# Altium PCB AT89S52精简开发板.PCBDOC (part 2 of 2)
Units mm, origin at the board's own origin, x right, y up, seen from the top; angles counter-clockwise.
Board outline 152.4 x 101.6 mm, 2 copper layers (Top Layer, Bottom Layer); 41 components, 53 nets, 208 pads, 4 vias.
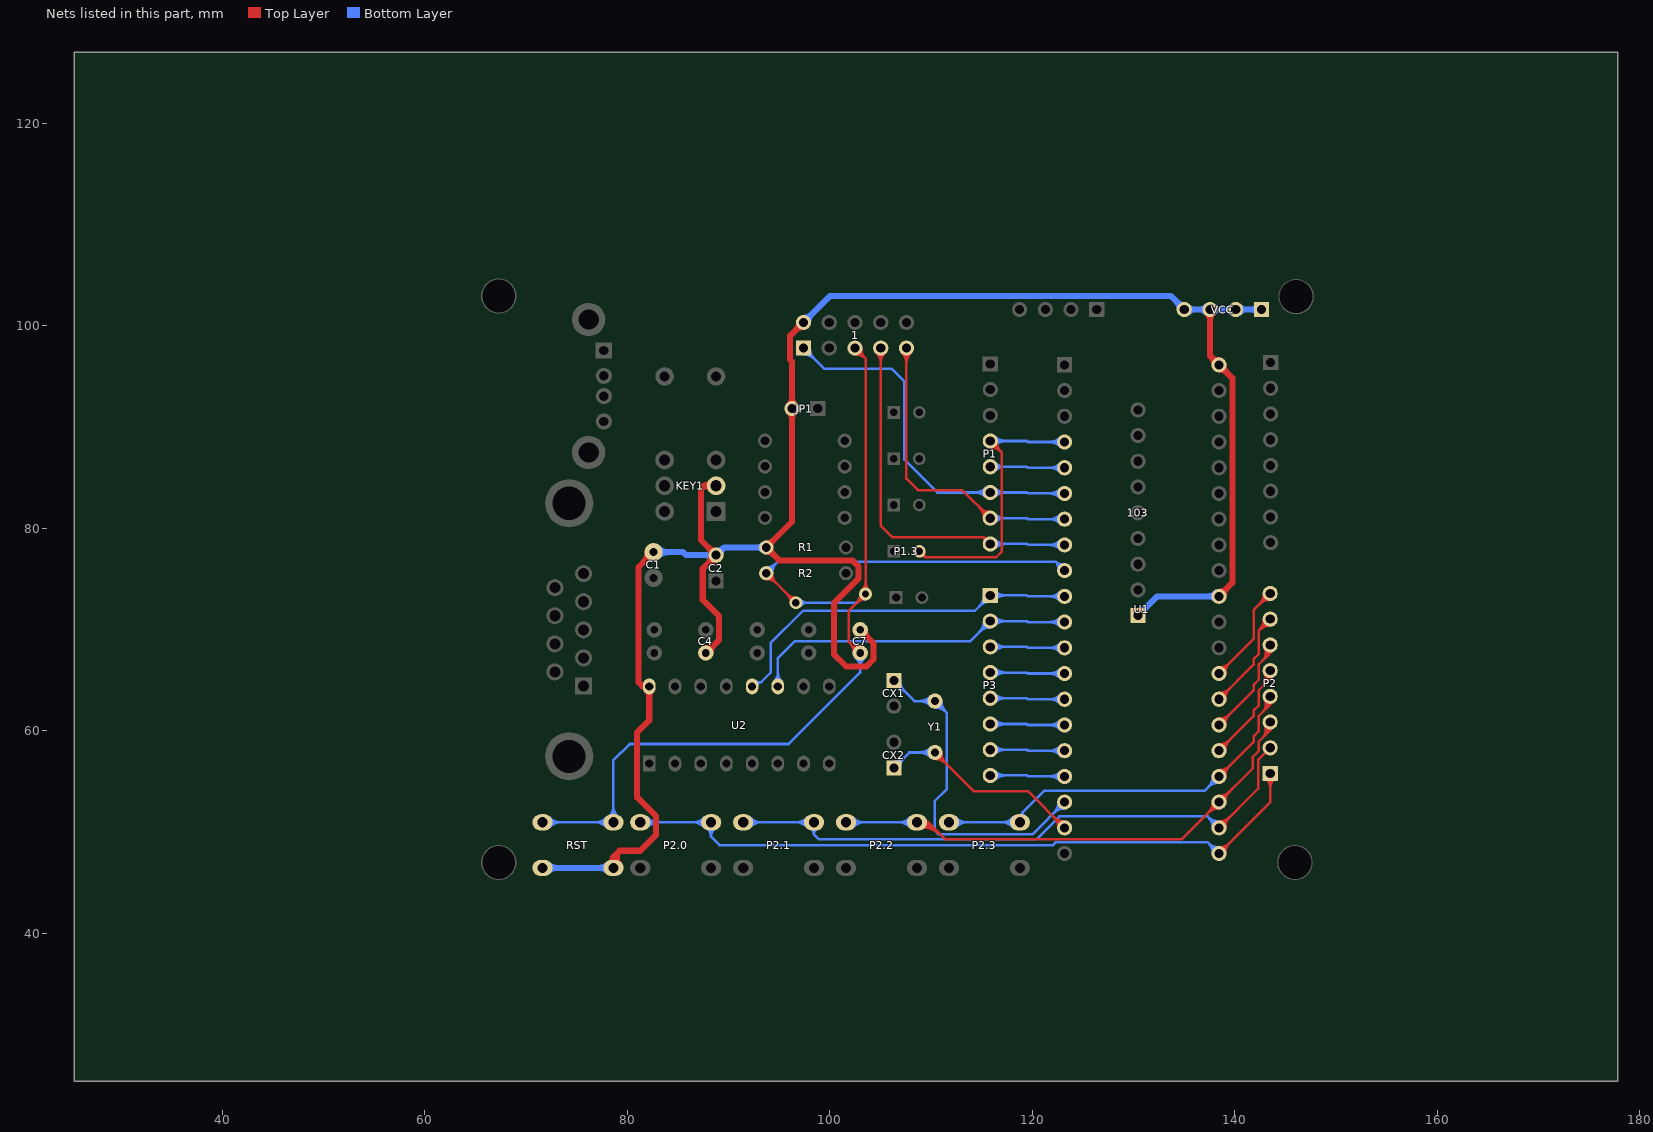
[diagram p2: the nets of this part, all layers, seen from the top]

## Via types
v1: diameter 1.27, hole 0.711, Top Layer to Bottom Layer, 4 vias

## Nets (pads, with @x,y where several pads share a name; then routed paths per layer and width w, separated by ;. In a path a pad name is that pad's centre, name@x,y a point inside that pad or via, vN(x,y) a via of type N, cw(c..) or ccw(c..) an arc to the next point about the centre after c; other vN are vias at no path point) (continued)
P1.3: P1.3.2 P1.4 U1.4 | length 39.6
  Top Layer w0.254: P1.3.2@108.839,77.724 109.423,77.14 ; P1.3.2@108.986,77.248 cw(c109.115,76.831) 109.423,77.14 ; P1.3.2@109.315,77.577 ccw(c109.732,77.448) 109.423,77.14 ; P1.4@115.847,87.992 cw(c115.847,86.488) 116.911,87.551 cw(c117.974,88.615) P1.4@116.47,88.615 ; P1.4@115.847,88.246 cw(c115.847,87.355) 116.477,87.985 cw(c117.107,88.615) P1.4@116.216,88.615 ; P1.4@115.847,88.615 116.992,87.47 116.992,77.724 116.408,77.14 109.423,77.14
  Bottom Layer w0.254: P1.4@115.847,88.615 119.456,88.615 119.552,88.519 U1.4@123.19,88.519 ; P1.4@116.108,88.354 cw(c116.738,87.724) 116.738,88.615 cw(c116.738,89.506) P1.4@116.108,88.876 ; P1.4@116.288,88.174 cw(c117.351,87.111) 117.351,88.615 cw(c117.351,90.119) P1.4@116.288,89.056 ; U1.4@122.749,88.078 ccw(c121.686,87.015) 121.686,88.519 ccw(c121.686,90.023) U1.4@122.749,88.96 ; U1.4@122.929,88.258 ccw(c122.299,87.628) 122.299,88.519 ccw(c122.299,89.41) U1.4@122.929,88.78
P1.4: P1.5 U1.5 | length 14.9
  Bottom Layer w0.254: P1.5@115.847,86.075 119.456,86.075 119.552,85.979 U1.5@123.19,85.979 ; P1.5@116.108,85.814 cw(c116.738,85.184) 116.738,86.075 cw(c116.738,86.966) P1.5@116.108,86.336 ; P1.5@116.288,85.634 cw(c117.351,84.571) 117.351,86.075 cw(c117.351,87.579) P1.5@116.288,86.516 ; U1.5@122.749,85.538 ccw(c121.686,84.475) 121.686,85.979 ccw(c121.686,87.483) U1.5@122.749,86.42 ; U1.5@122.929,85.718 ccw(c122.299,85.088) 122.299,85.979 ccw(c122.299,86.87) U1.5@122.929,86.24
P1.5: 1.1 P1.6 U1.6 | length 51.3
  Bottom Layer w0.254: 1.1@97.409,97.167 cw(c97.409,95.663) 98.473,96.726 cw(c99.536,97.79) 1.1@98.032,97.79 ; 1.1@97.409,97.421 cw(c97.409,96.53) 98.039,97.16 cw(c98.669,97.79) 1.1@97.778,97.79 ; 1.1@97.409,97.79 99.466,95.733 106.121,95.733 107.366,94.488 107.366,86.792 110.623,83.535 P1.6@115.847,83.535 119.456,83.535 119.552,83.439 U1.6@123.19,83.439 ; P1.6@115.406,83.094 ccw(c114.343,82.031) 114.343,83.535 ccw(c114.343,85.039) P1.6@115.406,83.976 ; P1.6@115.586,83.274 ccw(c114.956,82.644) 114.956,83.535 ccw(c114.956,84.426) P1.6@115.586,83.796 ; P1.6@116.108,83.274 cw(c116.738,82.644) 116.738,83.535 cw(c116.738,84.426) P1.6@116.108,83.796 ; P1.6@116.288,83.094 cw(c117.351,82.031) 117.351,83.535 cw(c117.351,85.039) P1.6@116.288,83.976 ; U1.6@122.749,82.998 ccw(c121.686,81.935) 121.686,83.439 ccw(c121.686,84.943) U1.6@122.749,83.88 ; U1.6@122.929,83.178 ccw(c122.299,82.548) 122.299,83.439 ccw(c122.299,84.33) U1.6@122.929,83.7
P1.6: 1.9 P1.7 U1.7 | length 45.2
  Top Layer w0.254: 1.9@107.128,97.349 cw(c106.065,96.286) 107.569,96.286 cw(c109.073,96.286) 1.9@108.01,97.349 ; 1.9@107.308,97.529 cw(c106.678,96.899) 107.569,96.899 cw(c108.46,96.899) 1.9@107.83,97.529 ; 1.9@107.569,97.79 107.569,84.912 108.712,83.769 113.073,83.769 P1.7@115.847,80.995 ; P1.7@115.224,80.995 ccw(c113.72,80.995) 114.783,82.059 ccw(c115.847,83.122) P1.7@115.847,81.618 ; P1.7@115.478,80.995 ccw(c114.587,80.995) 115.217,81.625 ccw(c115.847,82.255) P1.7@115.847,81.364
  Bottom Layer w0.254: P1.7@115.847,80.995 119.456,80.995 119.552,80.899 U1.7@123.19,80.899 ; P1.7@116.108,80.734 cw(c116.738,80.104) 116.738,80.995 cw(c116.738,81.886) P1.7@116.108,81.256 ; P1.7@116.288,80.554 cw(c117.351,79.491) 117.351,80.995 cw(c117.351,82.499) P1.7@116.288,81.436 ; U1.7@122.749,80.458 ccw(c121.686,79.395) 121.686,80.899 ccw(c121.686,82.403) U1.7@122.749,81.34 ; U1.7@122.929,80.638 ccw(c122.299,80.008) 122.299,80.899 ccw(c122.299,81.79) U1.7@122.929,81.16
P1.7: 1.7 P1.8 U1.8 | length 48.6
  Top Layer w0.254: 1.7@104.588,97.349 cw(c103.525,96.286) 105.029,96.286 cw(c106.533,96.286) 1.7@105.47,97.349 ; 1.7@104.768,97.529 cw(c104.138,96.899) 105.029,96.899 cw(c105.92,96.899) 1.7@105.29,97.529 ; 1.7@105.029,97.79 105.029,80.264 106.197,79.096 115.206,79.096 ; P1.8@115.278,78.709 ccw(c114.961,78.85) 115.206,79.096 ; P1.8@115.593,79.024 cw(c115.452,79.341) 115.206,79.096 ; P1.8@115.847,78.455 115.206,79.096
  Bottom Layer w0.254: P1.8@115.847,78.455 119.456,78.455 119.552,78.359 U1.8@123.19,78.359 ; P1.8@116.108,78.194 cw(c116.738,77.564) 116.738,78.455 cw(c116.738,79.346) P1.8@116.108,78.716 ; P1.8@116.288,78.014 cw(c117.351,76.951) 117.351,78.455 cw(c117.351,79.959) P1.8@116.288,78.896 ; U1.8@122.749,77.918 ccw(c121.686,76.855) 121.686,78.359 ccw(c121.686,79.863) U1.8@122.749,78.8 ; U1.8@122.929,78.098 ccw(c122.299,77.468) 122.299,78.359 ccw(c122.299,79.25) U1.8@122.929,78.62
P2.0: P2.0.2 P2.1 U1.21 | length 92.4
  Top Layer w0.254: U1.21@138.43,47.879 143.487,52.936 P2.1@143.487,55.784 ; U1.21@138.43,48.248 ccw(c138.43,49.139) 139.06,48.509 ccw(c139.69,47.879) U1.21@138.799,47.879 ; U1.21@138.43,48.502 ccw(c138.43,50.006) 139.494,48.943 ccw(c140.557,47.879) U1.21@139.053,47.879 ; P2.1@143.046,55.343 cw(c141.983,54.28) 143.487,54.28 cw(c144.991,54.28) P2.1@143.928,55.343 ; P2.1@143.226,55.523 cw(c142.596,54.893) 143.487,54.893 cw(c144.378,54.893) P2.1@143.748,55.523
  Bottom Layer w0.254: P2.0.2@81.288,50.967 P2.0.2@88.265,50.967 ; P2.0.2@81.784,50.671 cw(c82.5,49.956) 82.5,50.967 cw(c82.5,51.979) P2.0.2@81.784,51.263 ; P2.0.2@81.964,50.491 cw(c83.113,49.342) 83.113,50.967 cw(c83.113,52.592) P2.0.2@81.964,51.443 ; P2.0.2@87.612,50.491 ccw(c86.463,49.342) 86.463,50.967 ccw(c86.463,52.592) P2.0.2@87.612,51.443 ; P2.0.2@87.792,50.671 ccw(c87.076,49.956) 87.076,50.967 ccw(c87.076,51.979) P2.0.2@87.792,51.263 ; P2.0.2@87.85,50.456 cw(c87.08,49.555) 88.265,49.555 ; P2.0.2@88.016,50.649 cw(c87.552,50.107) 88.265,50.107 ; 88.265,50.071 cw(c88.976,50.071) P2.0.2@88.543,50.635 ; P2.0.2@88.288,50.967 P2.0.2@88.265,50.967 ; P2.0.2@88.698,50.433 ccw(c89.372,49.555) 88.265,49.555 ; U1.21@137.807,47.879 ccw(c136.303,47.879) 137.366,48.943 ccw(c138.43,50.006) U1.21@138.43,48.502 ; U1.21@138.061,47.879 ccw(c137.17,47.879) 137.8,48.509 ccw(c138.43,49.139) U1.21@138.43,48.248 ; U1.21@138.43,47.879 137.299,49.01 122.34,49.01 122.047,48.717 89.103,48.717 88.265,49.555 ; 88.265,49.555 P2.0.2@88.265,50.967
P2.1: P2.1.2 P2.2 U1.22 | length 77.1
  Top Layer w0.254: U1.22@138.43,50.419 142.291,54.28 142.291,57.128 P2.2@143.487,58.324 ; U1.22@138.43,50.788 ccw(c138.43,51.679) 139.06,51.049 ccw(c139.69,50.419) U1.22@138.799,50.419 ; U1.22@138.43,51.042 ccw(c138.43,52.546) 139.494,51.483 ccw(c140.557,50.419) U1.22@139.053,50.419
  Bottom Layer w0.254: P2.1.2@91.448,50.967 P2.1.2@98.425,50.967 ; P2.1.2@91.944,50.671 cw(c92.66,49.956) 92.66,50.967 cw(c92.66,51.979) P2.1.2@91.944,51.263 ; P2.1.2@92.124,50.491 cw(c93.273,49.342) 93.273,50.967 cw(c93.273,52.592) P2.1.2@92.124,51.443 ; P2.1.2@97.772,50.491 ccw(c96.623,49.342) 96.623,50.967 ccw(c96.623,52.592) P2.1.2@97.772,51.443 ; P2.1.2@97.952,50.671 ccw(c97.236,49.956) 97.236,50.967 ccw(c97.236,51.979) P2.1.2@97.952,51.263 ; P2.1.2@98.087,50.399 cw(c97.696,49.784) 98.425,49.784 ; P2.1.2@98.448,50.967 P2.1.2@98.425,50.967 ; P2.1.2@98.775,50.379 ccw(c99.106,49.784) 98.425,49.784 ; U1.22@137.807,50.419 ccw(c136.303,50.419) 137.366,51.483 ccw(c138.43,52.546) U1.22@138.43,51.042 ; U1.22@138.061,50.419 ccw(c137.17,50.419) 137.8,51.049 ccw(c138.43,51.679) U1.22@138.43,50.788 ; U1.22@138.43,50.419 137.299,51.55 122.668,51.55 120.396,49.278 98.931,49.278 98.425,49.784 ; 98.425,49.784 P2.1.2@98.425,50.967
P2.2: P2.2.2 P2.3 U1.23 | length 78
  Top Layer w0.254: P2.2.2@108.608,50.967 109.728,50.967 ; P2.2.2@108.808,50.548 cw(c108.808,47.316) 111.094,49.601 ; P2.2.2@108.808,50.802 cw(c108.808,48.183) 110.66,50.035 ; P2.2.2@108.808,51.056 cw(c108.808,49.05) 110.227,50.469 ; P2.2.2@108.808,51.31 cw(c108.808,49.917) 109.793,50.902 ; P2.2.2@109.449,50.763 cw(c109.728,50.675) 109.728,50.967 ; P2.2.2@109.449,51.171 ccw(c109.728,51.259) 109.728,50.967 ; U1.23@137.807,52.959 cw(c136.303,52.959) 137.366,51.895 cw(c138.43,50.832) U1.23@138.43,52.336 ; U1.23@138.061,52.959 cw(c137.17,52.959) 137.8,52.329 cw(c138.43,51.699) U1.23@138.43,52.59 ; U1.23@138.43,53.328 ccw(c138.43,54.219) 139.06,53.589 ccw(c139.69,52.959) U1.23@138.799,52.959 ; U1.23@138.43,53.582 ccw(c138.43,55.086) 139.494,54.023 ccw(c140.557,52.959) U1.23@139.053,52.959 ; 142.759,59.331 ccw(c142.019,60.07) P2.3@142.939,60.568 ; 142.999,59.571 ccw(c142.332,60.239) P2.3@143.162,60.688 ; 143.24,59.812 ccw(c142.644,60.408) P2.3@143.386,60.809 ; P2.3@143.331,60.261 cw(c143.278,60.059) 143.487,60.059 ; 143.481,60.053 ccw(c142.957,60.578) P2.3@143.609,60.93 ; P2.3@143.487,60.864 143.487,60.059 ; P2.3@143.643,60.261 ccw(c143.696,60.059) 143.487,60.059 ; 109.728,50.967 111.419,49.276 134.747,49.276 U1.23@138.43,52.959 141.765,56.294 141.765,57.423 142.356,58.014 142.356,58.928 143.487,60.059
  Bottom Layer w0.254: P2.2.2@101.608,50.967 P2.2.2@108.608,50.967 ; P2.2.2@102.104,50.671 cw(c102.82,49.956) 102.82,50.967 cw(c102.82,51.979) P2.2.2@102.104,51.263 ; P2.2.2@102.284,50.491 cw(c103.433,49.342) 103.433,50.967 cw(c103.433,52.592) P2.2.2@102.284,51.443 ; P2.2.2@107.932,50.491 ccw(c106.783,49.342) 106.783,50.967 ccw(c106.783,52.592) P2.2.2@107.932,51.443 ; P2.2.2@108.112,50.671 ccw(c107.396,49.956) 107.396,50.967 ccw(c107.396,51.979) P2.2.2@108.112,51.263
P2.3: P2.3.2 P2.4 U1.24 | length 60.9
  Top Layer w0.254: U1.24@138.43,55.499 141.848,58.917 141.848,59.455 142.356,59.963 142.356,61.468 143.487,62.599 ; U1.24@138.43,55.868 ccw(c138.43,56.759) 139.06,56.129 ccw(c139.69,55.499) U1.24@138.799,55.499 ; U1.24@138.43,56.122 ccw(c138.43,57.626) 139.494,56.563 ccw(c140.557,55.499) U1.24@139.053,55.499 ; 142.759,61.871 ccw(c142.019,62.61) P2.4@142.939,63.108 ; 142.999,62.111 ccw(c142.332,62.779) P2.4@143.162,63.228 ; 143.24,62.352 ccw(c142.644,62.948) P2.4@143.386,63.349 ; P2.4@143.331,62.801 cw(c143.278,62.599) 143.487,62.599 ; 143.481,62.593 ccw(c142.957,63.118) P2.4@143.609,63.47 ; P2.4@143.487,63.404 143.487,62.599 ; P2.4@143.643,62.801 ccw(c143.696,62.599) 143.487,62.599
  Bottom Layer w0.254: P2.3.2@111.768,50.967 P2.3.2@118.768,50.967 119.024,50.967 119.024,51.943 ; P2.3.2@112.264,50.671 cw(c112.98,49.956) 112.98,50.967 cw(c112.98,51.979) P2.3.2@112.264,51.263 ; P2.3.2@112.444,50.491 cw(c113.593,49.342) 113.593,50.967 cw(c113.593,52.592) P2.3.2@112.444,51.443 ; P2.3.2@118.092,50.491 ccw(c116.943,49.342) 116.943,50.967 ccw(c116.943,52.592) P2.3.2@118.092,51.443 ; P2.3.2@118.272,50.671 ccw(c117.556,49.956) 117.556,50.967 ccw(c117.556,51.979) P2.3.2@118.272,51.263 ; P2.3.2@118.777,51.613 ccw(c118.68,51.943) 119.024,51.943 ; P2.3.2@119.257,51.575 cw(c119.432,51.943) 119.024,51.943 ; U1.24@137.807,55.499 cw(c136.303,55.499) 137.366,54.435 cw(c138.43,53.372) U1.24@138.43,54.876 ; U1.24@138.061,55.499 cw(c137.17,55.499) 137.8,54.869 cw(c138.43,54.239) U1.24@138.43,55.13 ; U1.24@138.43,55.499 137.033,54.102 121.183,54.102 119.024,51.943
P2.4: P2.5 U1.25 | length 18.9
  Top Layer w0.254: U1.25@138.43,58.039 141.848,61.457 141.848,61.995 142.356,62.503 142.356,64.008 143.487,65.139 ; U1.25@138.43,58.408 ccw(c138.43,59.299) 139.06,58.669 ccw(c139.69,58.039) U1.25@138.799,58.039 ; U1.25@138.43,58.662 ccw(c138.43,60.166) 139.494,59.103 ccw(c140.557,58.039) U1.25@139.053,58.039 ; 142.759,64.411 ccw(c142.019,65.15) P2.5@142.939,65.648 ; 142.999,64.651 ccw(c142.332,65.319) P2.5@143.162,65.768 ; 143.24,64.892 ccw(c142.644,65.488) P2.5@143.386,65.889 ; P2.5@143.331,65.341 cw(c143.278,65.139) 143.487,65.139 ; 143.481,65.133 ccw(c142.957,65.658) P2.5@143.609,66.01 ; P2.5@143.487,65.944 143.487,65.139 ; P2.5@143.643,65.341 ccw(c143.696,65.139) 143.487,65.139
P2.5: P2.6 U1.26 | length 18.9
  Top Layer w0.254: U1.26@138.43,60.579 141.848,63.997 141.848,64.535 142.356,65.043 142.356,66.548 143.487,67.679 ; U1.26@138.43,60.948 ccw(c138.43,61.839) 139.06,61.209 ccw(c139.69,60.579) U1.26@138.799,60.579 ; U1.26@138.43,61.202 ccw(c138.43,62.706) 139.494,61.643 ccw(c140.557,60.579) U1.26@139.053,60.579 ; 142.759,66.951 ccw(c142.019,67.69) P2.6@142.939,68.188 ; 142.999,67.191 ccw(c142.332,67.859) P2.6@143.162,68.308 ; 143.24,67.432 ccw(c142.644,68.028) P2.6@143.386,68.429 ; P2.6@143.331,67.881 cw(c143.278,67.679) 143.487,67.679 ; 143.481,67.673 ccw(c142.957,68.198) P2.6@143.609,68.55 ; P2.6@143.487,68.484 143.487,67.679 ; P2.6@143.643,67.881 ccw(c143.696,67.679) 143.487,67.679
P2.6: P2.7 U1.27 | length 17.5
  Top Layer w0.254: U1.27@138.43,63.119 141.848,66.537 141.848,67.075 142.356,67.583 142.356,69.893 P2.7@143.487,71.024 ; U1.27@138.43,63.488 ccw(c138.43,64.379) 139.06,63.749 ccw(c139.69,63.119) U1.27@138.799,63.119 ; U1.27@138.43,63.742 ccw(c138.43,65.246) 139.494,64.183 ccw(c140.557,63.119) U1.27@139.053,63.119 ; P2.7@142.864,71.024 cw(c141.36,71.024) 142.423,69.96 cw(c143.487,68.897) P2.7@143.487,70.401 ; P2.7@143.118,71.024 cw(c142.227,71.024) 142.857,70.394 cw(c143.487,69.764) P2.7@143.487,70.655
P2.7: P2.8 U1.28 | length 17.5
  Top Layer w0.254: U1.28@138.43,65.659 141.848,69.077 141.848,71.925 P2.8@143.487,73.564 ; U1.28@138.43,66.028 ccw(c138.43,66.919) 139.06,66.289 ccw(c139.69,65.659) U1.28@138.799,65.659 ; U1.28@138.43,66.282 ccw(c138.43,67.786) 139.494,66.723 ccw(c140.557,65.659) U1.28@139.053,65.659 ; P2.8@142.864,73.564 cw(c141.36,73.564) 142.423,72.5 cw(c143.487,71.437) P2.8@143.487,72.941 ; P2.8@143.118,73.564 cw(c142.227,73.564) 142.857,72.934 cw(c143.487,72.304) P2.8@143.487,73.195
P3.0: P3.1 U1.10 U2.12 | length 49.2
  Bottom Layer w0.254: U2.12@92.33,64.385 92.33,64.795 93.218,64.795 ; U2.12@92.57,64.505 cw(c92.916,64.445) 92.916,64.795 ; U2.12@92.682,64.9 ccw(c92.934,65.152) 92.934,64.795 ; U2.12@92.821,64.462 cw(c93.218,64.392) 93.218,64.795 ; P3.1@115.224,73.375 cw(c113.72,73.375) 114.783,72.311 cw(c115.847,71.248) P3.1@115.847,72.752 ; P3.1@115.478,73.375 cw(c114.587,73.375) 115.217,72.745 cw(c115.847,72.115) P3.1@115.847,73.006 ; P3.1@116.108,73.114 cw(c116.738,72.484) 116.738,73.375 cw(c116.738,74.266) P3.1@116.108,73.636 ; P3.1@116.288,72.934 cw(c117.351,71.871) 117.351,73.375 cw(c117.351,74.879) P3.1@116.288,73.816 ; U1.10@122.749,72.838 ccw(c121.686,71.775) 121.686,73.279 ccw(c121.686,74.783) U1.10@122.749,73.72 ; U1.10@122.929,73.018 ccw(c122.299,72.388) 122.299,73.279 ccw(c122.299,74.17) U1.10@122.929,73.54 ; U1.10@123.19,73.279 119.552,73.279 119.456,73.375 P3.1@115.847,73.375 114.329,71.857 97.358,71.857 94.158,68.656 94.158,65.735 93.218,64.795
P3.1: P3.2 U1.11 U2.11 | length 45.8
  Bottom Layer w0.254: U2.11@94.518,64.9 ccw(c93.668,65.75) 94.87,65.75 ccw(c96.072,65.75) U2.11@95.222,64.9 ; U2.11@94.87,64.385 94.87,67.184 96.52,68.834 113.846,68.834 P3.2@115.847,70.835 119.456,70.835 119.552,70.739 U1.11@123.19,70.739 ; P3.2@115.224,70.835 cw(c113.72,70.835) 114.783,69.771 cw(c115.847,68.708) P3.2@115.847,70.212 ; P3.2@115.478,70.835 cw(c114.587,70.835) 115.217,70.205 cw(c115.847,69.575) P3.2@115.847,70.466 ; P3.2@116.108,70.574 cw(c116.738,69.944) 116.738,70.835 cw(c116.738,71.726) P3.2@116.108,71.096 ; P3.2@116.288,70.394 cw(c117.351,69.331) 117.351,70.835 cw(c117.351,72.339) P3.2@116.288,71.276 ; U1.11@122.749,70.298 ccw(c121.686,69.235) 121.686,70.739 ccw(c121.686,72.243) U1.11@122.749,71.18 ; U1.11@122.929,70.478 ccw(c122.299,69.848) 122.299,70.739 ccw(c122.299,71.63) U1.11@122.929,71
P3.2: P3.3 U1.12 | length 14.9
  Bottom Layer w0.254: P3.3@115.847,68.295 119.456,68.295 119.552,68.199 U1.12@123.19,68.199 ; P3.3@116.108,68.034 cw(c116.738,67.404) 116.738,68.295 cw(c116.738,69.186) P3.3@116.108,68.556 ; P3.3@116.288,67.854 cw(c117.351,66.791) 117.351,68.295 cw(c117.351,69.799) P3.3@116.288,68.736 ; U1.12@122.749,67.758 ccw(c121.686,66.695) 121.686,68.199 ccw(c121.686,69.703) U1.12@122.749,68.64 ; U1.12@122.929,67.938 ccw(c122.299,67.308) 122.299,68.199 ccw(c122.299,69.09) U1.12@122.929,68.46
P3.3: P3.4 U1.13 | length 14.9
  Bottom Layer w0.254: P3.4@115.847,65.755 119.456,65.755 119.552,65.659 U1.13@123.19,65.659 ; P3.4@116.108,65.494 cw(c116.738,64.864) 116.738,65.755 cw(c116.738,66.646) P3.4@116.108,66.016 ; P3.4@116.288,65.314 cw(c117.351,64.251) 117.351,65.755 cw(c117.351,67.259) P3.4@116.288,66.196 ; U1.13@122.749,65.218 ccw(c121.686,64.155) 121.686,65.659 ccw(c121.686,67.163) U1.13@122.749,66.1 ; U1.13@122.929,65.398 ccw(c122.299,64.768) 122.299,65.659 ccw(c122.299,66.55) U1.13@122.929,65.92
P3.4: P3.5 U1.14 | length 14.9
  Bottom Layer w0.254: P3.5@115.847,63.215 119.456,63.215 119.552,63.119 U1.14@123.19,63.119 ; P3.5@116.108,62.954 cw(c116.738,62.324) 116.738,63.215 cw(c116.738,64.106) P3.5@116.108,63.476 ; P3.5@116.288,62.774 cw(c117.351,61.711) 117.351,63.215 cw(c117.351,64.719) P3.5@116.288,63.656 ; U1.14@122.749,62.678 ccw(c121.686,61.615) 121.686,63.119 ccw(c121.686,64.623) U1.14@122.749,63.56 ; U1.14@122.929,62.858 ccw(c122.299,62.228) 122.299,63.119 ccw(c122.299,64.01) U1.14@122.929,63.38
P3.5: P3.6 U1.15 | length 14.9
  Bottom Layer w0.254: P3.6@115.847,60.675 119.456,60.675 119.552,60.579 U1.15@123.19,60.579 ; P3.6@116.108,60.414 cw(c116.738,59.784) 116.738,60.675 cw(c116.738,61.566) P3.6@116.108,60.936 ; P3.6@116.288,60.234 cw(c117.351,59.171) 117.351,60.675 cw(c117.351,62.179) P3.6@116.288,61.116 ; U1.15@122.749,60.138 ccw(c121.686,59.075) 121.686,60.579 ccw(c121.686,62.083) U1.15@122.749,61.02 ; U1.15@122.929,60.318 ccw(c122.299,59.688) 122.299,60.579 ccw(c122.299,61.47) U1.15@122.929,60.84
P3.6: P3.7 U1.16 | length 14.9
  Bottom Layer w0.254: P3.7@115.847,58.135 119.456,58.135 119.552,58.039 U1.16@123.19,58.039 ; P3.7@116.108,57.874 cw(c116.738,57.244) 116.738,58.135 cw(c116.738,59.026) P3.7@116.108,58.396 ; P3.7@116.288,57.694 cw(c117.351,56.631) 117.351,58.135 cw(c117.351,59.639) P3.7@116.288,58.576 ; U1.16@122.749,57.598 ccw(c121.686,56.535) 121.686,58.039 ccw(c121.686,59.543) U1.16@122.749,58.48 ; U1.16@122.929,57.778 ccw(c122.299,57.148) 122.299,58.039 ccw(c122.299,58.93) U1.16@122.929,58.3
P3.7: P3.8 U1.17 | length 14.9
  Bottom Layer w0.254: P3.8@115.847,55.595 119.456,55.595 119.552,55.499 U1.17@123.19,55.499 ; P3.8@116.108,55.334 cw(c116.738,54.704) 116.738,55.595 cw(c116.738,56.486) P3.8@116.108,55.856 ; P3.8@116.288,55.154 cw(c117.351,54.091) 117.351,55.595 cw(c117.351,57.099) P3.8@116.288,56.036 ; U1.17@122.749,55.058 ccw(c121.686,53.995) 121.686,55.499 ccw(c121.686,57.003) U1.17@122.749,55.94 ; U1.17@122.929,55.238 ccw(c122.299,54.608) 122.299,55.499 ccw(c122.299,56.39) U1.17@122.929,55.76
RESRT: 1.5 C7.2 R2.2 RST.2 U1.9 | length 158.3
  Top Layer w0.254: R2.2@93.726,74.992 cw(c93.726,73.609) 94.704,74.587 cw(c95.682,75.565) R2.2@94.299,75.565 ; R2.2@93.726,75.246 cw(c93.726,74.476) 94.271,75.02 cw(c94.815,75.565) R2.2@94.045,75.565 ; R2.2@93.726,75.565 v1(96.647,72.644) ; v1@96.139,72.644 ccw(c94.913,72.644) 95.78,73.511 ccw(c96.647,74.378) v1@96.647,73.152 ; C7.2@102.362,67.691 ccw(c100.829,67.691) 101.913,68.775 ccw(c102.997,69.859) C7.2@102.997,68.326 ; 1.5@102.489,97.79 103.535,96.744 ; 1.5@102.493,97.421 cw(c102.503,96.565) 103.109,97.17 cw(c103.714,97.776) 1.5@102.858,97.786 ; 1.5@102.496,97.167 cw(c102.513,95.723) 103.535,96.744 ; C7.2@102.616,67.691 ccw(c101.696,67.691) 102.347,68.341 ccw(c102.997,68.992) C7.2@102.997,68.072 ; C7.2@102.997,67.691 101.854,68.834 101.854,71.831 v1(103.53,73.508) 103.535,73.512 103.535,96.744 ; v1@103.022,73.508 cw(c101.796,73.508) 102.663,72.64 cw(c103.53,71.773) v1@103.53,73 ; 1.5@103.112,97.783 ccw(c104.556,97.766) 103.535,96.744 ; v1@103.171,73.867 ccw(c102.293,74.745) 103.535,74.745 ; 103.535,74.723 ccw(c104.746,74.723) v1@103.89,73.867
  Bottom Layer w0.254: RST.2@71.636,50.967 RST.2@78.613,50.967 ; RST.2@72.132,50.671 cw(c72.848,49.956) 72.848,50.967 cw(c72.848,51.979) RST.2@72.132,51.263 ; RST.2@72.312,50.491 cw(c73.461,49.342) 73.461,50.967 cw(c73.461,52.592) RST.2@72.312,51.443 ; RST.2@77.96,50.491 ccw(c76.811,49.342) 76.811,50.967 ccw(c76.811,52.592) RST.2@77.96,51.443 ; RST.2@78.14,50.671 ccw(c77.424,49.956) 77.424,50.967 ccw(c77.424,51.979) RST.2@78.14,51.263 ; RST.2@78.16,51.443 ccw(c77.067,52.536) 78.613,52.536 ; RST.2@78.34,51.263 ccw(c77.68,51.923) 78.613,51.923 ; 78.613,52.034 ccw(c79.703,52.034) RST.2@78.932,51.263 ; 78.613,52.648 ccw(c80.316,52.648) RST.2@79.112,51.443 ; RST.2@78.636,50.967 RST.2@78.613,50.967 ; R2.2@93.726,75.565 94.869,76.708 122.301,76.708 ; R2.2@93.726,75.884 ccw(c93.726,76.654) 94.271,76.11 ccw(c94.815,75.565) R2.2@94.045,75.565 ; R2.2@93.726,76.138 ccw(c93.726,77.521) 94.704,76.543 ccw(c95.682,75.565) R2.2@94.299,75.565 ; v1(96.647,72.644) 102.667,72.644 ; v1@97.006,72.285 cw(c97.873,71.418) 97.873,72.644 cw(c97.873,73.87) v1@97.006,73.003 ; C7.2@102.548,67.242 cw(c101.464,66.158) 102.997,66.158 cw(c104.53,66.158) C7.2@103.446,67.242 ; C7.2@102.728,67.422 cw(c102.077,66.771) 102.997,66.771 cw(c103.917,66.771) C7.2@103.266,67.422 ; C7.2@102.997,67.691 102.997,65.761 95.936,58.699 80.264,58.699 78.613,57.048 RST.2@78.613,50.967 ; v1@103.022,73.506 cw(c101.808,73.502) 102.667,72.644 ; v1@103.529,73 ccw(c103.525,71.786) 102.667,72.644 ; v1(103.53,73.508) 102.667,72.644 ; U1.9@122.573,75.903 ccw(c121.624,76.031) 122.301,76.708 ; U1.9@123.106,76.436 cw(c122.978,77.385) 122.301,76.708 ; U1.9@123.19,75.819 122.301,76.708
VCC: 1.2 103.9 C1.1 C2.2 C4.2 C7.1 JP1.2 KEY1.2 R1.1 RST.1 U1.31 U1.40 U2.16 VCC.1 VCC.2 VCC.3 VCC.4 | length 275.9
  Top Layer w0.6: RST.1@78.305,46.842 ccw(c77.705,47.523) 78.613,47.523 ; RST.1@78.636,46.467 78.613,46.467 78.613,47.523 ; RST.1@78.761,46.401 cw(c79.473,47.035) 78.799,47.709 ; RST.1@78.939,46.865 cw(c79.441,47.523) 78.613,47.523 ; RST.1@79.209,46.8 cw(c79.948,47.459) 79.248,48.158 ; U2.16@81.912,64.188 ccw(c81.512,63.882) 81.512,64.385 ; U2.16@81.912,64.583 cw(c81.512,64.888) 81.512,64.385 ; U2.16@81.94,63.993 cw(c81.385,63.438) 82.17,63.438 cw(c82.955,63.438) U2.16@82.4,63.993 ; C1.1@82.001,77.648 cw(c80.552,77.648) 81.577,76.624 cw(c82.601,75.599) C1.1@82.601,77.048 ; C1.1@82.601,77.648 81.128,76.175 81.128,64.77 81.512,64.385 ; 87.33,83.901 cw(c88.251,82.98) KEY1.2@88.763,84.178 ; 87.537,84.108 cw(c88.189,83.456) KEY1.2@88.758,84.181 ; C4.2@87.757,67.691 89.078,69.012 89.078,71.298 87.452,72.923 87.452,76.022 C2.2@88.773,77.343 87.274,78.842 87.274,83.845 87.63,84.201 ; C4.2@87.757,68.153 ccw(c87.757,69.268) 88.546,68.48 ccw(c89.334,67.691) C4.2@88.219,67.691 ; KEY1.2@88.247,83.864 ccw(c87.63,83.468) 87.63,84.201 ; KEY1.2@88.247,84.538 cw(c87.63,84.934) 87.63,84.201 ; C2.2@88.773,76.893 ccw(c88.773,75.807) 88.005,76.575 ccw(c87.237,77.343) 88.323,77.343 ccw(c87.237,77.343) 88.005,78.111 ccw(c88.773,78.879) C2.2@88.773,77.793 ; KEY1.2@88.773,84.201 87.63,84.201 ; R1.1@93.726,77.705 cw(c93.726,76.739) 94.409,77.422 cw(c95.092,78.105) 94.126,78.105 cw(c95.092,78.105) 94.409,78.788 cw(c93.726,79.471) R1.1@93.726,78.505 ; JP1.2@95.948,91.503 cw(c95.18,90.735) 96.266,90.735 cw(c97.352,90.735) JP1.2@96.584,91.503 ; JP1.2@95.948,92.139 ccw(c95.18,92.907) 96.266,92.907 ccw(c97.352,92.907) JP1.2@96.584,92.139 ; 1.2@96.959,100.33 cw(c95.873,100.33) 96.641,99.562 cw(c97.409,98.794) 1.2@97.409,99.88 ; 1.2@97.409,100.33 96.088,99.009 96.088,96.647 96.266,96.469 JP1.2@96.266,91.821 96.266,80.645 R1.1@93.726,78.105 94.996,76.835 102.219,76.835 102.854,76.2 102.854,75.046 100.406,72.598 100.406,67.564 101.6,66.37 103.632,66.37 104.318,67.056 104.318,68.656 C7.1@102.997,69.977 ; C7.1@102.997,69.515 cw(c102.997,68.4) 103.786,69.188 cw(c104.574,69.977) C7.1@103.459,69.977 ; VCC.3@137.223,101.282 cw(c136.455,100.514) 137.541,100.514 cw(c138.627,100.514) VCC.3@137.859,101.282 ; VCC.3@137.541,101.6 137.541,97.028 U1.40@138.43,96.139 139.751,94.818 139.751,74.6 U1.31@138.43,73.279 ; U1.40@137.98,96.139 ccw(c136.894,96.139) 137.662,96.907 ccw(c138.43,97.675) U1.40@138.43,96.589 ; U1.31@138.43,73.729 ccw(c138.43,74.815) 139.198,74.047 ccw(c139.966,73.279) U1.31@138.88,73.279 ; U1.40@138.43,95.689 cw(c138.43,94.603) 139.198,95.371 cw(c139.966,96.139) U1.40@138.88,96.139 ; 78.613,47.523 79.248,48.158 ; 79.248,48.158 81.28,48.158 82.855,49.733 82.855,51.562 80.975,53.442 80.975,59.841 82.17,61.036 U2.16@82.17,64.385 81.512,64.385
  Bottom Layer w0.6: RST.1@71.636,46.467 RST.1@78.636,46.467 ; RST.1@72.19,46.114 cw(c73.043,45.26) 73.043,46.467 cw(c73.043,47.674) RST.1@72.19,46.821 ; RST.1@78.082,46.114 ccw(c77.229,45.26) 77.229,46.467 ccw(c77.229,47.674) RST.1@78.082,46.821 ; C1.1@82.601,77.648 85.522,77.648 85.827,77.343 C2.2@88.773,77.343 89.535,78.105 ; C1.1@83.025,77.224 cw(c84.049,76.199) 84.049,77.648 cw(c84.049,79.096) C1.1@83.025,78.072 ; C2.2@88.455,77.025 ccw(c87.687,76.257) 87.687,77.343 ccw(c87.687,78.429) C2.2@88.455,77.661 ; C2.2@88.776,77.793 ccw(c88.782,78.858) 89.535,78.105 ; C2.2@89.223,77.346 cw(c90.288,77.352) 89.535,78.105 ; R1.1@93.443,77.822 ccw(c92.76,77.139) 92.76,78.105 ccw(c92.76,79.071) R1.1@93.443,78.388 ; R1.1@93.726,78.105 89.535,78.105 ; 1.2@97.409,100.33 100.025,102.946 133.655,102.946 VCC.4@135.001,101.6 VCC.3@137.541,101.6 VCC.2@140.081,101.6 VCC.1@142.621,101.6 ; 1.2@97.409,100.78 ccw(c97.409,101.866) 98.177,101.098 ccw(c98.945,100.33) 1.2@97.859,100.33 ; 103.9@130.429,71.374 132.334,73.279 U1.31@138.43,73.279 ; 103.9@130.429,71.824 ccw(c130.429,72.91) 131.197,72.142 ccw(c131.965,71.374) 103.9@130.879,71.374 ; VCC.4@134.551,101.6 ccw(c133.465,101.6) 134.233,102.368 ccw(c135.001,103.136) VCC.4@135.001,102.05 ; VCC.4@135.319,101.282 cw(c136.087,100.514) 136.087,101.6 cw(c136.087,102.686) VCC.4@135.319,101.918 ; VCC.3@137.223,101.282 ccw(c136.455,100.514) 136.455,101.6 ccw(c136.455,102.686) VCC.3@137.223,101.918 ; VCC.3@137.859,101.282 cw(c138.627,100.514) 138.627,101.6 cw(c138.627,102.686) VCC.3@137.859,101.918 ; U1.31@138.112,72.961 ccw(c137.344,72.193) 137.344,73.279 ccw(c137.344,74.365) U1.31@138.112,73.597 ; VCC.2@139.763,101.282 ccw(c138.995,100.514) 138.995,101.6 ccw(c138.995,102.686) VCC.2@139.763,101.918 ; VCC.2@140.399,101.282 cw(c141.167,100.514) 141.167,101.6 cw(c141.167,102.686) VCC.2@140.399,101.918 ; VCC.1@142.303,101.282 ccw(c141.535,100.514) 141.535,101.6 ccw(c141.535,102.686) VCC.1@142.303,101.918
XTAL1: CX2.1 U1.19 Y1.1 | length 35.8
  Top Layer w0.254: Y1.1@110.388,57.226 cw(c110.388,55.693) 111.472,56.777 cw(c112.556,57.861) Y1.1@111.023,57.861 ; Y1.1@110.388,57.48 cw(c110.388,56.56) 111.039,57.211 cw(c111.689,57.861) Y1.1@110.769,57.861 ; Y1.1@110.388,57.861 114.198,54.051 119.558,54.051 U1.19@123.19,50.419 ; U1.19@122.567,50.419 ccw(c121.063,50.419) 122.126,51.483 ccw(c123.19,52.546) U1.19@123.19,51.042 ; U1.19@122.821,50.419 ccw(c121.93,50.419) 122.56,51.049 ccw(c123.19,51.679) U1.19@123.19,50.788
  Bottom Layer w0.254: CX2.1@106.324,56.337 107.848,57.861 Y1.1@110.388,57.861 ; CX2.1@106.324,56.706 ccw(c106.324,57.597) 106.954,56.967 ccw(c107.584,56.337) CX2.1@106.693,56.337 ; CX2.1@106.324,56.96 ccw(c106.324,58.464) 107.388,57.401 ccw(c108.451,56.337) CX2.1@106.947,56.337 ; Y1.1@109.939,57.412 ccw(c108.855,56.328) 108.855,57.861 ccw(c108.855,59.394) Y1.1@109.939,58.31 ; Y1.1@110.119,57.592 ccw(c109.469,56.941) 109.469,57.861 ccw(c109.469,58.781) Y1.1@110.119,58.131
XTAL2: CX1.1 U1.18 Y1.2 | length 48.2
  Bottom Layer w0.254: CX1.1@106.324,64.35 cw(c106.324,62.846) 107.388,63.91 cw(c108.451,64.973) CX1.1@106.947,64.973 ; CX1.1@106.324,64.604 cw(c106.324,63.713) 106.954,64.343 cw(c107.584,64.973) CX1.1@106.693,64.973 ; CX1.1@106.324,64.973 108.356,62.941 Y1.2@110.388,62.941 111.531,61.798 111.531,54.229 110.363,53.061 110.363,50.167 110.744,49.786 120.017,49.786 U1.18@123.19,52.959 ; Y1.2@109.939,62.492 ccw(c108.855,61.408) 108.855,62.941 ccw(c108.855,64.474) Y1.2@109.939,63.39 ; Y1.2@110.119,62.672 ccw(c109.469,62.021) 109.469,62.941 ccw(c109.469,63.861) Y1.2@110.119,63.211 ; Y1.2@110.388,62.306 cw(c110.388,60.773) 111.472,61.857 cw(c112.556,62.941) Y1.2@111.023,62.941 ; Y1.2@110.388,62.56 cw(c110.388,61.64) 111.039,62.291 cw(c111.689,62.941) Y1.2@110.769,62.941 ; U1.18@122.567,52.959 cw(c121.063,52.959) 122.126,51.895 cw(c123.19,50.832) U1.18@123.19,52.336 ; U1.18@122.821,52.959 cw(c121.93,52.959) 122.56,52.329 cw(c123.19,51.699) U1.18@123.19,52.59
pads on no net: 1.3 J1.1 J1.4 J1.6 J1.7 J1.8 J1.9 J1.10 J1.11 KEY1.3 KEY1.4 U1.29 U1.30 U2.7 U2.8 U2.9 U2.10 USB.2 USB.3 USB.5 USB.6
copper on no net: | length 128.7
  Top Layer w0.254: 61.976,45.974 62.484,44.45 ; 61.976,104.267 62.484,105.791 ; 62.23,44.45 62.738,44.45 ; 62.23,105.791 62.738,105.791 ; 62.484,67.35 62.484,44.45 ; 62.484,82.891 62.484,105.791 ; 62.992,45.974 62.484,44.45 ; 62.992,104.267 62.484,105.791 ; 64.643,107.442 64.643,107.95 ; 66.167,107.188 64.643,107.696 ; 66.167,108.204 64.643,107.696 ; 98.656,107.696 64.643,107.696 ; 114.704,107.696 148.717,107.696 ; 147.193,107.188 148.717,107.696 ; 147.193,108.204 148.717,107.696 ; 148.717,107.442 148.717,107.95

## Polygon pours and split planes (outlines as drawn)
no net on Top Layer (hatched 45Degree grid 0.508 track 0.203): 65.024,103.884 66.172,105.029 147.315,105.029 148.336,104.011 148.336,45.849 147.315,44.831 66.172,44.831 65.152,45.849 65.152,104.011
no net on Bottom Layer (hatched 45Degree grid 0.508 track 0.203): 65.024,103.884 66.174,105.029 147.314,105.029 148.336,104.011 148.336,45.849 147.314,44.831 66.046,44.831 65.024,45.849

## Other copper
Top Layer:
  text "84.074 (mm)" at 98.91,106.782 h1.52
  text "61.341 (mm)" at 63.398,67.604 h1.52 r90

## Silkscreen, mask and mechanical layers (free items; w line width, h text height)
Top Overlay:
  text "SN:090628" at 98.806,103.632 h1.02
  text "GND" at 82.169,100.584 h1.02
  text "VCC" at 87.376,100.584 h1.02
  text "P0.0" at 145.034,95.885 h1.02
  text "P1.0" at 117.348,95.758 h1.02
  text "P0.1" at 145.034,93.345 h1.02
  text "P1.1" at 117.348,93.218 h1.02
  text "P0.2" at 145.034,90.805 h1.02
  text "P1.2" at 117.348,90.678 h1.02
  text "P0.3" at 145.034,88.265 h1.02
  text "P1.3" at 117.348,88.138 h1.02
  text "P0.4" at 145.034,85.725 h1.02
  text "P1.4" at 117.348,85.598 h1.02
  text "P0.5" at 145.034,83.185 h1.02
  text "P1.5" at 117.348,83.058 h1.02
  text "P0.6" at 145.034,80.645 h1.02
  text "P1.6" at 117.348,80.391 h1.02
  text "P0.7" at 145.034,78.232 h1.02
  text "P1.7" at 117.475,77.978 h1.02
  text "P3.0" at 117.348,73.025 h1.02
  text "P2.7" at 145.034,73.025 h1.02
  text "P2.6" at 145.034,70.485 h1.02
  text "P3.1" at 117.348,70.358 h1.02
  text "*" at 131.064,68.326 h1.52 r90
  text "P2.5" at 145.034,67.945 h1.02
  text "P3.2" at 117.348,67.818 h1.02
  text "P2.4" at 145.034,65.405 h1.02
  text "P3.3" at 117.348,65.278 h1.02
  text "P2.3" at 145.034,62.992 h1.02
  text "P3.4" at 117.348,62.738 h1.02
  text "AT89S52" at 127.762,60.452 h1.02
  text "P2.2" at 145.034,60.198 h1.02
  text "MAX232" at 88.519,60.071 h1.02
  text "P3.5" at 117.348,60.071 h1.02
  text "P2.1" at 145.034,57.912 h1.02
  text "P3.6" at 117.348,57.785 h1.02
  text "P3.7" at 117.348,55.118 h1.02
  text "P2.0" at 145.034,55.118 h1.02
Mechanical 1:
  lines w0.254: 64.516,104.267 65.786,105.537 147.32,105.537 148.717,104.14 148.717,45.847 147.193,44.323 ; 64.516,104.394 64.516,45.847 66.04,44.323 147.32,44.323

## Text inside footprints (layer, text, board x,y; h text height)
1: Top Overlay "2" at 94.869,99.822 h1.02; Top Overlay "9" at 109.093,97.282 h1.02; Top Overlay "10" at 109.093,99.822 h1.02
J1: Top Overlay "9" at 69.745,73.632 h1.02 r90; Top Overlay "6" at 69.745,65.322 h1.02 r90